# Altium PCB Sensor_Box_Smart_IO.PCBDOC (part 1 of 2)
Units mil, origin at the board's own origin, x right, y up, seen from the top; angles counter-clockwise.
Board outline 895.86 x 2876.17 mil, 2 copper layers (Top, Bot), stack 61.855 mil thick; 100 components, 69 nets, 285 pads, 161 vias.
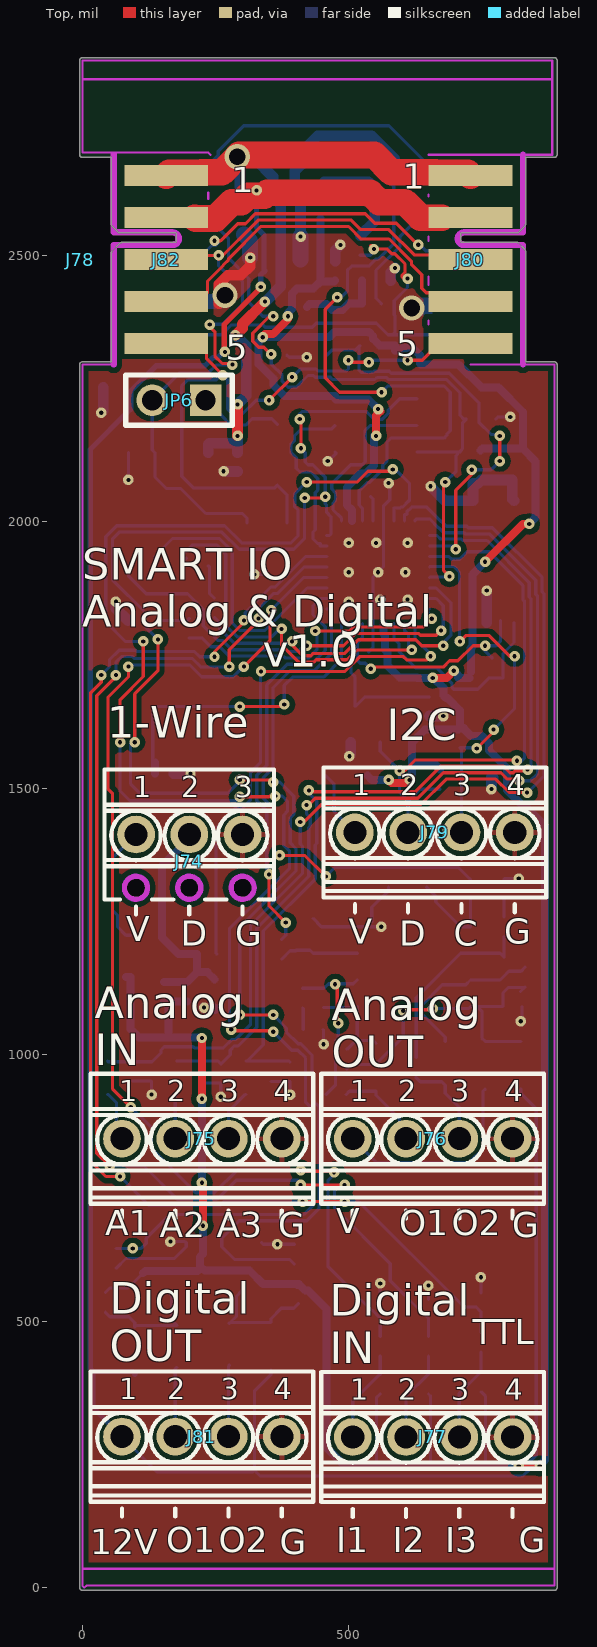
[diagram p0: Top view]
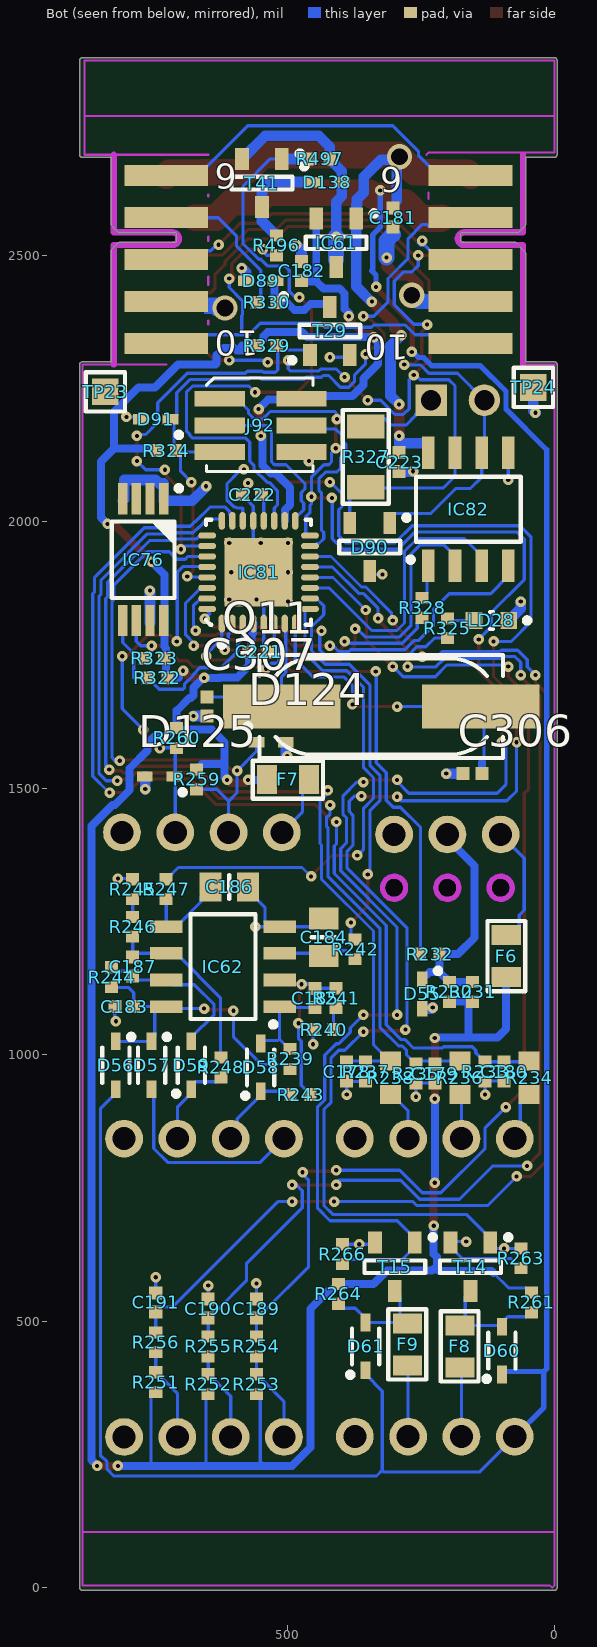
[diagram p1: Bot view, seen from below]
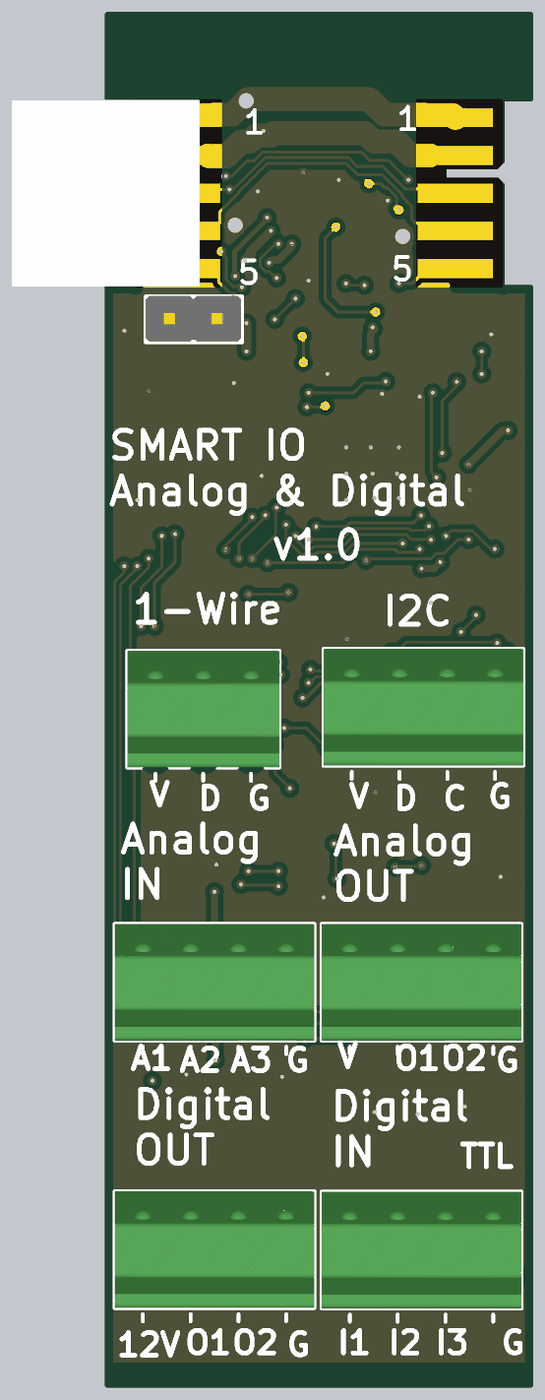
[diagram p3: 3D render of the assembled board from above, using the file's embedded part models]
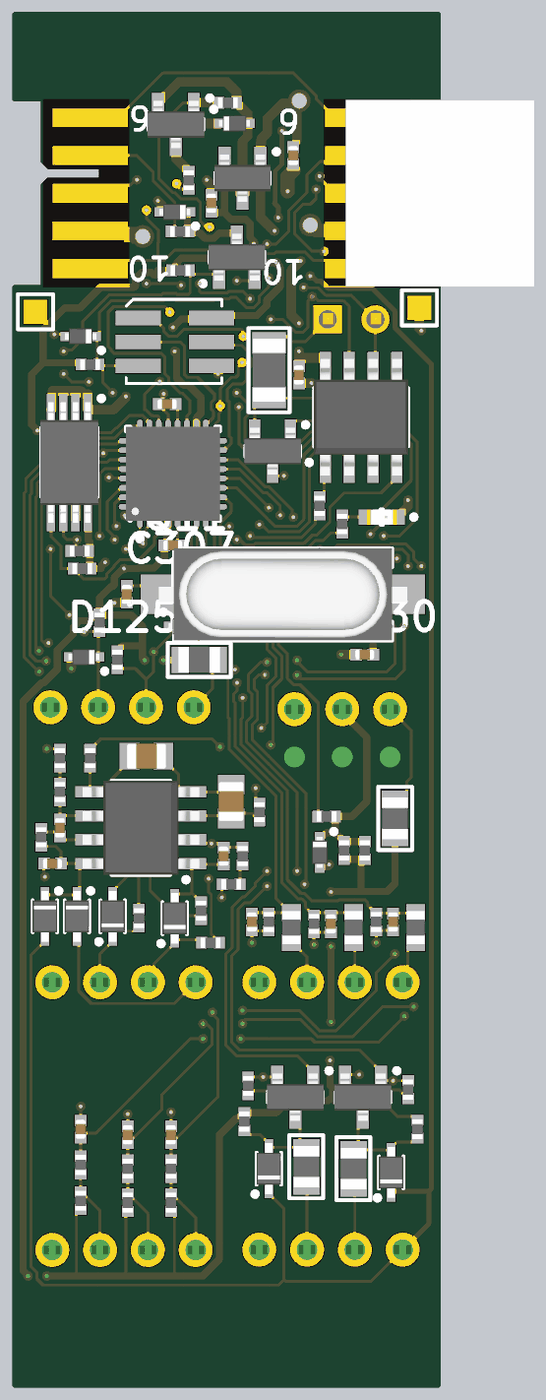
[diagram p4: 3D render of the assembled board from below, using the file's embedded part models]

## Layer stack, top to bottom
TopSolder: solder mask 0.4, Solder Resist, Dk 3.5
Top: signal copper 1.4
Dielectric1: core 59.0551, FR-4, Dk 4.8
Bot: signal copper 1.4
BottomSolder: solder mask 0.4, Solder Resist, Dk 3.5

## Board outline
-5.02,0 -5.02,2295.28 cw(c0,2295.28) 0,2300.29 54.04,2300.29 54.04,2503.94 cw(c59.06,2503.94) 55.53,2507.5 55.51,2507.48 71.26,2523.23 71.24,2523.21 cw(c74.8,2519.68) 74.8,2524.7 176.09,2524.7 176.09,2542.23 70.87,2542.23 cw(c70.87,2547.24) 67.3,2543.71 67.32,2543.7 55.51,2555.51 55.53,2555.49 cw(c59.06,2559.06) 54.04,2559.06 54.04,2683.96 0,2683.96 cw(c0,2688.98) -5.02,2688.98 -5.02,2866.14 ccw(c0,2866.14) -5.02,2866.14 cw(c0,2866.14) 0,2871.16 885.83,2871.16 cw(c885.83,2866.14) 890.84,2866.14 890.84,2688.98 cw(c885.83,2688.98) 885.83,2683.96 831.79,2683.96 831.79,2559.06 cw(c826.77,2559.06) 830.3,2555.49 830.32,2555.51 818.51,2543.7 818.52,2543.72 cw(c814.96,2547.24) 814.96,2542.23 709.74,2542.23 709.74,2524.7 814.96,2524.7 cw(c814.96,2519.69) 818.52,2523.21 818.51,2523.23 830.32,2511.42 830.3,2511.44 cw(c826.77,2507.87) 831.79,2507.87 831.79,2300.29 885.83,2300.29 cw(c885.83,2295.28) 890.84,2295.28 890.84,0 cw(c885.83,0) 885.83,-5.01 0.04,-5.01 cw(c0,0)

## Design rules (kind name [scope] priority, off if disabled: settings)
Clearance Clearance_DIFF [(InDifferentialPairClass('All Differential Pairs'))] p1: gap=5 ignorepadtopadclearanceinfootprint=FALSE except(0: Arc-Hole Track-Hole SMDPad-Hole THPad-Hole Via-Hole Fill-Hole Poly-Hole Region-Hole Text-Hole; 10: Arc-Poly Track-Poly SMDPad-Poly THPad-Poly Via-Poly Fill-Poly Poly-Poly Poly-Region Poly-Text)
Clearance [All] p2: gap=6 ignorepadtopadclearanceinfootprint=FALSE except(10: Arc-Poly Track-Poly SMDPad-Poly THPad-Poly Via-Poly Fill-Poly Poly-Poly)
DiffPairsRouting [All] p1: maxlimit=10 minlimit=5 mostfreqgap=5 toplayer_minwidth=5 toplayer_maxwidth=15 toplayer_prefwidth=10 bottomlayer_minwidth=5 bottomlayer_maxwidth=15 bottomlayer_prefwidth=10 maxuncoupledlength=500
FabricationTestPointUsage TestPointUsage [All] p1: valid=0 allowmultiple=FALSE
FabricationTestpoint Testpoint [All] p1: side=3 testpointundercomponent=TRUE minsize=40 maxsize=100 preferedsize=60 minholesize=20 maxholesize=40 preferedholesize=32 testpointgrid=1 allowsidetop=TRUE allowsidebottom=TRUE usegrid=TRUE gridtolerance=0.01
HoleSize [All] p1: absolutevalues=TRUE maxlimit=150 minlimit=1 maxpercent=80.000 minpercent=20.000
HoleToHoleClearance [All] p1: gap=1 allowstackedmicrovias=TRUE
MinimumSolderMaskSliver [All] p1: minsoldermaskwidth=0
PlaneClearance [All] p1: clearance=10
PlaneConnect [All] p1: planeconnectstyle=Direct reliefexpansion=20 reliefentries=4 reliefconductorwidth=10 reliefairgap=10
PolygonConnect PolygonConnect_pad [(InPadClass('All Pads'))] p1: connectstyle=Relief reliefconductorwidth=10 reliefentries=4 polygonreliefangle="90 Angle" airgapwidth=10
PolygonConnect [All] p2: connectstyle=Direct reliefconductorwidth=10 reliefentries=4 polygonreliefangle="45 Angle" airgapwidth=10
RoomDefinition Sensor_Box_Smart_IO [InComponentClass('Sensor_Box_Smart_IO')] p1 off: confinementstyle=ConfineIn formatcopy=TRUE lockcomponents=FALSE outline 793.29,1049.2 7988.16,1049.2 7988.16,1984.24 793.29,1984.24
RoutingVias [All] p1: holewidth=7.87 width=19.68 viastyle="Through Hole" minholewidth=7.87 minwidth=19.68 maxholewidth=28 maxwidth=50
SilkToSilkClearance [All] p1: silktosilkclearance=0
SilkToSolderMaskClearance SilkscreenOverComponentPads [IsPad] p1: minsilkscreentomaskgap=0 clearancetoexposedcopper=TRUE
SolderMaskExpansion [All] p1: expansion=2
Width [All] p1: maxlimit=50 minlimit=5 preferedwidth=5
20 further rules are at their usual default settings.

## Components (designator, comment, footprint, x,y, rotation, side; value= is the part's Value field where it differs from the comment)
C178 "100nF" CAPC1005X55N 389.76,968.5 r270 bottom
C179 "100nF" CAPC1005X55N 224.41,964.57 r270 bottom
C180 "100nF" CAPC1005X55N 94.49,968.5 r270 bottom
C181 "1uF" CAPC1005X55N 303.15,2570.87 r90 bottom
C182 "1uF" CAPC1005X55N 474.41,2471.1 r270 bottom
C183 "1uF" CAPC1005X55N 807.09,1090.55 r180 bottom
C184 "10uF" CAPC2012X135N 433.07,1220.47 r90 bottom
C185 "18pF" CAPC1005X55N 448.82,1106.3 r90 bottom
C186 "10uF" CAPC2012X135N 610.24,1314.96 r180 bottom
C187 "18pF" CAPC1005X55N 791.34,1165.35 r90 bottom
C189 "18pF" CAPC1005X55N 559.06,523.62 r90 bottom
C190 "18pF" CAPC1005X55N 649.61,523.62 r90 bottom
C191 "18pF" CAPC1005X55N 748.03,535.43 r90 bottom
C221 "100nF" CAPC1005X55N 555.12,1755.91 r0 bottom
C222 "1uF" CAPC1005X55N 567.15,2051.18 r0 bottom
C223 "100nF" CAPC1005X55N 291.34,2112.2 r270 bottom
C306 "18pF" CAPC1005X55N 153.75,1527.56 r180 bottom
C307 "18pF" CAPC1005X55N 651.62,1653.54 r90 bottom
D55 "PESD3V3S1UB" SODFL1608X65N 247.92,1114.17 r270 bottom
D56 "1N4148WS" SODFL2512X100N 822.83,980.31 r270 bottom
D57 "1N4148WS" SODFL2512X100N 755.91,980.31 r270 bottom
D58 "1N4148WS" SODFL2512X100N 551.18,976.38 r90 bottom
D59 "1N4148WS" SODFL2512X100N 681.1,980.31 r90 bottom
D60 "1N4148WS" SODFL2512X100N 98.43,444.88 r90 bottom
D61 "1N4148WS" SODFL2512X100N 354.33,452.76 r90 bottom
D89 "PESD3V3S1UB" SODFL1608X65N 551.04,2452.76 r0 bottom
D90 "SM712" SOT95P237X112-3N 346.46,1952.76 r270 bottom
D91 "PESD3V3S1UB" SODFL1608X65N 748.03,2192.91 r0 bottom
D124 "PESD3V3S1UB" SODFL1608X65N 531.5,1586.61 r180 bottom
D125 "PESD3V3S1UB" SODFL1608X65N 741.04,1522.21 r0 bottom
D138 "PESD3V3S1UB" SODFL1608X65N 426.27,2637.8 r180 bottom
F6 "RFSI050" 0805R 90.55,1185.04 r270 bottom
F7 "RFSI050" 0805R 500,1516.64 r0 bottom
F8 "RFSI050" 0805R 177.17,452.76 r90 bottom
F9 "RFSI050" 0805R 275.59,456.69 r90 bottom
IC61 "AP7313-33SAG-7" SOT95P240X130-3N 409.45,2523.62 r270 bottom
IC62 "LM358AD" SOIC127P600X175-8N 622.05,1165.35 r0 bottom
IC76 "M24256-BRDW6" SOP65P640X120-8N 771.65,1929.13 r270 bottom
IC81 "ATMEGA328PB-MU" QFN50P500X500X100-33N-S325 555.12,1905.51 r90 bottom
IC82 "ST485ECDR" SOIC127P600X175-8N 161.42,2023.62 r90 bottom
J74 "=Family" PHOENIX_1725669 200.79,1413.39 r0 top
J75 "=Family" PHOENIX_1725672 224.41,842.52 r0 top
J76 "=Family" PHOENIX_1725672 657.48,842.52 r0 top
J77 "=Family" PHOENIX_1725672 657.48,282.78 r0 top
J78 "=Family" "AVX_00 9159 010 061 916" -3.94,2492.13 r180 top
J79 "=Family" PHOENIX_1725672 661.42,1417.32 r0 top
J80 "=Family" EDGE10T5B10_P200W1000L0F100X400 728.35,2334.65 r90 top
J81 "=Family" PHOENIX_1725672 224.41,283.46 r0 top
J82 "=Family" EDGE10T1B6_P200W1000L0F100X400 157.48,2649.61 r270 top
J92 "ZL322-2X3P or PLHTD6S-TR-CV" ZL322-2X3P 551.18,2181.1 r270 bottom
JP6 "1798942 (goldpin 2x 2.54)" jump 231.3,2228.35 r270 top
LD28 "Green" LED_KINGBRIGHT_KPH-1608CGCK 118.11,1814.96 r0 bottom
Q11 "8.192MHz" XTAL_ABRACON_ABLS 324.8,1653.54 r0 bottom locked
R230 "10k" RESC1005X40N 196.85,1118.11 r270 bottom
R231 "10k" RESC1005X40N 153.54,1118.11 r270 bottom
R232 "49R9" RESC1005X40N 233.8,1188.98 r0 bottom
R233 "1k" RESC1005X40N 129.92,968.5 r90 bottom
R234 "9k1" RESC1608X55N 47.24,956.69 r270 bottom
R235 "1k" RESC1005X40N 259.84,964.57 r90 bottom
R236 "9k1" RESC1608X55N 177.17,956.69 r270 bottom
R237 "1k" RESC1005X40N 354.33,968.5 r90 bottom
R238 "9k1" RESC1608X55N 307.09,956.69 r270 bottom
R239 "10k" RESC1005X40N 496.06,992.13 r90 bottom
R240 "10k" RESC1005X40N 433.07,1047.24 r0 bottom
R241 "10k" RESC1005X40N 409.45,1106.3 r270 bottom
R242 "10k" RESC1005X40N 374.02,1198.03 r90 bottom
R243 "10k" RESC1005X40N 476.38,925.2 r180 bottom
R244 "10k" RESC1005X40N 830.71,1145.67 r90 bottom
R245 "10k" RESC1005X40N 791.34,1311.02 r90 bottom
R246 "10k" RESC1005X40N 791.34,1240.16 r90 bottom
R247 "10k" RESC1005X40N 728.35,1311.02 r90 bottom
R248 "10k" RESC1005X40N 625.98,976.38 r90 bottom
R251 "10k" RESC1005X40N 748.03,385.83 r90 bottom
R252 "10k" RESC1005X40N 649.61,381.89 r90 bottom
R253 "10k" RESC1005X40N 559.06,381.89 r90 bottom
R254 "10k" RESC1005X40N 559.06,452.76 r270 bottom
R255 "10k" RESC1005X40N 649.61,452.76 r270 bottom
R256 "10k" RESC1005X40N 748.03,460.63 r270 bottom
R259 "1k" RESC1005X40N 671.31,1516.64 r270 bottom
R260 "1k" RESC1005X40N 708.66,1594.49 r270 bottom
R261 "10k" RESC1005X40N 43.31,535.43 r270 bottom
R263 "100k" RESC1005X40N 62.99,618.11 r90 bottom
R264 "10k" RESC1005X40N 405.51,551.18 r270 bottom
R266 "100k" RESC1005X40N 397.64,625.98 r270 bottom
R322 "10k" RESC1005X40N 744.78,1707.32 r0 bottom
R323 "10k" RESC1005X40N 750.51,1744.09 r0 bottom
R324 "10k" RESC1005X40N 728.35,2133.86 r180 bottom
R325 "10k" RESC1005X40N 200.79,1800.39 r90 bottom
R327 "120R" 1206R 353.88,2122.05 r90 bottom
R328 "1k" RESC1005X40N 248.03,1838.58 r90 bottom
R329 "100k" RESC1005X40N 539.37,2330.71 r0 bottom
R330 "49R9" RESC1005X40N 540.17,2412.07 r180 bottom
R496 "49R9" RESC1005X40N 521.73,2518.84 r90 bottom
R497 "10k" RESC1005X40N 440.1,2681.1 r180 bottom
T14 "BSS138LT1G" SOT95P240X110-3N 157.48,602.36 r270 bottom
T15 "BSS138LT1G" SOT95P240X110-3N 299.21,602.36 r270 bottom
T29 "BSS138LT1G" SOT95P240X110-3N 421.26,2358.27 r90 bottom
T41 "BSS138LT1G" SOT95P240X110-3N 548.69,2635.83 r270 bottom
TP23 "Test Point" TPS127 842.52,2244.09 r270 bottom
TP24 "Test Point" TPS127 39.37,2252.28 r270 bottom

## Footprints (in the part's own frame and the unit in brackets; to place one, negate y for a bottom-side part, rotate by r counter-clockwise, add the part's x,y. Pads: shape width x height; smd on the part's side, far side on the other; paste and mask are expansions set on the pad)
0805R [mm]
  rect 0.95x1.4 smd: 1(-1,0) 2(1,0)
  silkscreen extent -1.68,-0.89 1.68,0.91, body extent -1.1,-0.67 1.1,0.68, height 0.6
1206R [mm]
  rect 1.15x1.8 smd: 1(-1.45,0) 2(1.45,0)
  silkscreen extent -2.24,-1.09 2.24,1.09, body extent -1.67,-0.87 1.68,0.88, height 0.65
"AVX_00 9159 010 061 916" [mil] "10 Contacts, 2mm Pitch, Open Ended Card Edge Connector, 9159 Series"
  body extent -197,-195 197,195, height 67
CAPC1005X55N [mm] "Chip Capacitor, Body 1.0x0.55mm, IPC Medium Density"
  rect 0.62x0.62 smd: 1(-0.45,0) 2(0.45,0)
  body extent -0.52,-0.27 0.53,0.28, height 0.55
CAPC2012X135N [mm] "Chip Capacitor, Body 2.0x1.25mm, IPC Medium Density"
  rect 1.05x1.4 smd: 1(-0.9,0) 2(0.9,0)
  silkscreen extent 0,-0.58 0,0.58, body extent -1.05,-0.67 1.05,0.68, height 1.25
EDGE10T1B6_P200W1000L0F100X400 [mm] "10 contacts Board Edge Connector, First Left Top Pad 1, First Left Bottom Pad 2, Pitch 2mm, Length 0mm, Width 10mm, Finger Lenght 4mm, Finger Width 1mm"
  rect 1x4 smd paste-0.5: 1(0,0) 2(2,0) 3(4,0) 4(6,0) 5(8,0)
  rect 1x4 smd far side paste-0.5: 6(0,0) 7(2,0) 8(4,0) 9(6,0) 10(8,0)
  KeepOutLayer lines w0.3: 9,-2.5 3.3,-2.5 3.3,0.3 ccw(c3,0.3) 2.7,0.3 2.7,-2.5 -1,-2.5
EDGE10T5B10_P200W1000L0F100X400 [mm] "10 contacts Board Edge Connector, First Left Top Pad 5, First Left Bottom Pad 10, Pitch 2mm, Length 0mm, Width 10mm, Finger Lenght 4mm, Finger Width 1mm"
  rect 1x4 smd paste-0.5: 1(8,0) 2(6,0) 3(4,0) 4(2,0) 5(0,0)
  rect 1x4 smd far side paste-0.5: 6(8,0) 7(6,0) 8(4,0) 9(2,0) 10(0,0)
  KeepOutLayer lines w0.3: -1,-2.5 4.7,-2.5 4.7,0.3 cw(c5,0.3) 5.3,0.3 5.3,-2.5 9,-2.5
jump [mm]
  rect 1.5x1.5 hole 0.965: 1(0,0)
  round 1.5 hole 0.965: 2(0,-2.54)
  silkscreen extent -1.2,-3.81 1.2,1.27, body extent -1.26,-3.84 1.19,1.24, height 8
LED_KINGBRIGHT_KPH-1608CGCK [mm] "SMT Green LED, Case 0603, Body L 1.6 x W 0.8mm H 0.65mm"
  rect 0.8x0.8 smd: 1(-0.825,0) 2(0.825,0)
  silkscreen extent -1.82,-0.4 0.08,0.4, body extent -0.8,-0.4 0.8,0.4, height 0.65
PHOENIX_1725669 [mm] "Micro PCB Terminal Block, Pitch 2.54mm, 3 Positions, Screw Connection"
  round 1.8 hole 1.1: 1(-2.54,0) 2(0,0) 3(2.54,0)
  round 0.5 hole 1.1 unplated mask+0.3: 4(-2.54,-2.54) 5(0,-2.54) 6(2.54,-2.54)
  silkscreen extent -4.04,-3.81 4.04,3.1, body extent -4.04,-3.1 4.04,3.1, height 8.5
PHOENIX_1725672 [mm] "Micro PCB Terminal Block, Pitch 2.54mm, 4 Positions, Screw Connection"
  round 1.8 hole 1.1: 1(-3.81,0) 2(-1.27,0) 3(1.27,0) 4(3.81,0)
  silkscreen extent -5.31,-3.81 5.31,3.1, body extent -5.31,-3.1 5.31,3.1, height 8.5
QFN50P500X500X100-33N-S325 [mm] "QFN, (MO-220-VHHD-4) 0.50mm pitch,square; 8 pin X 8 pin, 5mm X 5mm X 1.00mm H body (w/thermal tab 3.25 X 3.25mm),  IPC Medium Density"
  oval 0.85x0.3 smd: 1(-2.45,1.75) 2(-2.45,1.25) 3(-2.45,0.75) 4(-2.45,0.25) 5(-2.45,-0.25) 6(-2.45,-0.75) 7(-2.45,-1.25) 8(-2.45,-1.75) 17(2.45,-1.75) 18(2.45,-1.25) 19(2.45,-0.75) 20(2.45,-0.25) 21(2.45,0.25) 22(2.45,0.75) 23(2.45,1.25) 24(2.45,1.75)
  oval 0.3x0.85 smd: 9(-1.75,-2.45) 10(-1.25,-2.45) 11(-0.75,-2.45) 12(-0.25,-2.45) 13(0.25,-2.45) 14(0.75,-2.45) 15(1.25,-2.45) 16(1.75,-2.45) 25(1.75,2.45) 26(1.25,2.45) 27(0.75,2.45) 28(0.25,2.45) 29(-0.25,2.45) 30(-0.75,2.45) 31(-1.25,2.45) 32(-1.75,2.45)
  rect 3.25x3.25 smd: 33(0,0)
  silkscreen extent -3.57,-2.5 2.5,2.5, body extent -2.5,-2.5 2.5,2.5, height 1
RESC1005X40N [mm] "Chip Resistor, EIA 0402, Metric 1005, Body 1.0x0.5mm, IPC Medium Density"
  rect 0.58x0.62 smd: 1(-0.47,0) 2(0.47,0)
  body extent -0.52,-0.27 0.53,0.28, height 0.4
RESC1608X55N [mm] "Chip Resistor, EIA 0603, Metric 1608, Body 1.6x0.8mm, IPC Medium Density"
  rect 0.9x1 smd: 1(-0.8,0) 2(0.8,0)
  body extent -0.87,-0.47 0.88,0.48, height 0.55
SODFL1608X65N [mm] "Ultra Small Outline Diode Flat Lead (SOD-523), Body; 1.2mm L X 0.8mm W X 0.65mm H, IPC Medium Density"
  rect 0.75x0.5 smd: 1(-0.7,0) 2(0.7,0)
  silkscreen extent -1.22,0.63 -0.98,0.87, body extent -0.82,-0.42 0.83,0.43, height 0.65
SODFL2512X100N [mm] "SODFL Diode; 1.70mm W X 1.25mm L X 1.00mm H body, IPC Medium Density"
  rect 0.84x0.46 smd: 1(-1.14,0) 2(1.14,0)
  silkscreen extent -1.47,-0.65 0.85,0.85, body extent -1.35,-0.65 1.35,0.65, height 1
SOIC127P600X175-8N [mm] "SOIC 8, Pitch 1.27mm - Body 4x5mm, IPC Medium Density"
  rect 1.55x0.6 smd: 1(-2.7,1.905) 2(-2.7,0.635) 3(-2.7,-0.635) 4(-2.7,-1.905) 5(2.7,-1.905) 6(2.7,-0.635) 7(2.7,0.635) 8(2.7,1.905)
  silkscreen extent -2.52,-2.5 1.55,2.88, body extent -3.1,-2.5 3.1,2.5, height 1.75
SOP65P640X120-8N [mm] "SOP, 0.65mm pitch; 8 pin, 4.40mm W X 3.00mm L X 1.20mm H body, IPC Medium Density"
  rect 1.5x0.45 smd: 1(-2.9,0.975) 2(-2.9,0.325) 3(-2.9,-0.325) 4(-2.9,-0.975) 5(2.9,-0.975) 6(2.9,-0.325) 7(2.9,0.325) 8(2.9,0.975)
  silkscreen extent -3.52,-1.5 1.83,1.82, body extent -3.2,-1.55 3.2,1.55, height 1.2
SOT95P237X112-3N [mm] "SOT, 0.95mm, pitch; 3 pin,1.30mm W X 2.92mm L X 1.12mm H body, IPC Medium Density"
  rect 1.05x0.6 smd: 1(-1.15,0.95) 2(-1.15,-0.95) 3(1.15,0)
  silkscreen extent -1.52,-1.45 0.3,1.87, body extent -1.25,-1.5 1.25,1.5, height 1.1
SOT95P240X110-3N [mm] "SOT23 3-Leads, Pitch 0.95mm, Body 1.3x2.9mm, IPC Medium Density"
  rect 1.05x0.65 smd: 1(-1.15,0.95) 2(-1.15,-0.95) 3(1.15,0)
  silkscreen extent -1.52,-1.45 0.3,1.92, body extent -1.25,-1.5 1.25,1.5, height 1.1
SOT95P240X130-3N [mm] "SOT23 3-Leads, Pitch 0.95mm - Body 1.3x2.9mm, IPC Medium Density"
  rect 1.05x0.65 smd: 1(-1.15,0.95) 2(-1.15,-0.95) 3(1.15,0)
  silkscreen extent -1.52,-1.45 0.3,1.92, body extent -1.25,-1.5 1.25,1.5, height 1.3
TPS127 [mil] "1.27 x  1.27mm SMD Test Point Area"
  rect 50x50 smd paste-50: 1(0,0)
  silkscreen extent -37,-37 37,37
XTAL_ABRACON_ABLS [mm] "HC/49US (AT49) SMD Cristal, Body 11.4x4.7mm, ABLS Serie"
  rect 5.6x2.1 smd: 1(-4.75,0) 2(4.75,0)
  silkscreen extent -5.8,-2.45 5.8,2.45, body extent -6.6,-2.45 6.6,2.45, height 4.2
ZL322-2X3P [mm] "SMT 1.27 mm dual goldpin"
  rect 0.76x2.4 smd: 1(-1.27,-1.95) 2(-1.27,1.95) 3(0,-1.95) 4(0,1.95) 5(1.27,-1.95) 6(1.27,1.95)
  silkscreen extent -2.25,-2.58 2.2,2.5, body extent -2.05,-2.15 2.03,2.15, height 4.5

## Part data
C178 C179 C180 C223: library part CC0402_100NF_16V_10%_X7R, "Non-polarised capacitor", Case=0402, Manufacturer=GENERIC, Manufacturer1 ComponentHeight=0.55mm, Manufacturer1 Example=MURATA, Manufacturer1 Part Number=GRM155R71C104KA88D, Tolerance=±10%, Voltage=16V, Author="CERN DEM JLC", Component Type=Standard, CreateDate=05.12.2013, HelpURL=\\cern.ch\dfs\Applications\Altium\Datasheets\CC0402_X7R_MURATA_GRM.pdf, LatestRevisionDate=03.12.2007, Manufacturer Part Number=CC0402_100NF_16V_10%_X7R, Mounted=Yes, Part Description="SMD Multilayer Chip Ceramic Capacitor", Part Number=CC0402_100NF_16V_10%_X7R, Pin Count=2, Sense=No, SMD=Yes, Socket=No, Status="Not Recommended", TC=X7R
C181 C182 C183 C222: library part CC0402_1UF_16V_10%_X5R, "Non-polarised capacitor", Case=0402, Manufacturer=GENERIC, Manufacturer1 ComponentHeight=0.55mm, Manufacturer1 Example=TDK, Manufacturer1 Part Number=C1005X5R1C105KT, Tolerance=±10%, Voltage=16V, Author="CERN DEM JLC", Component Type=Standard, CreateDate=25.10.2012, HelpURL=\\cern.ch\dfs\Applications\Altium\Datasheets\CC0402_X5R_TDK_C.pdf, LatestRevisionDate=25.10.2012, Manufacturer Part Number=CC0402_1UF_16V_10%_X5R, Mounted=Yes, Part Description="SMD Multilayer Chip Ceramic Capacitor", Part Number=CC0402_1UF_16V_10%_X5R, Pin Count=2, Sense=No, SMD=Yes, Socket=No, Status=Preferred, TC=X5R
C184 C186: library part CC0805_10UF_16V_10%_X5R, "Non-polarised capacitor", Case=0805, Manufacturer=GENERIC, Manufacturer1 ComponentHeight=1.4mm, Manufacturer1 Example=KEMET, Manufacturer1 Part Number=C0805C106K4PAC, Tolerance=±10%, Voltage=16V, Author="CERN DEM JLC", Component Type=Standard, CreateDate=03.12.2007, HelpURL=\\cern.ch\dfs\Applications\Altium\Datasheets\CC1206_X5R_KEMET.pdf, LatestRevisionDate=03.12.2007, Manufacturer Part Number=CC0805_10UF_16V_10%_X5R, Mounted=Yes, Part Description="SMD Multilayer Chip Ceramic Capacitor", Part Number=CC0805_10UF_16V_10%_X5R, Pin Count=2, Sense=No, SMD=Yes, Socket=No, Status=Preferred, TC=X5R
C185 C187 C189 C190 C191 C306 C307: library part CC0402_18PF_50V_5%_C0G, "Non-polarised capacitor", Case=0402, Manufacturer=GENERIC, Manufacturer1 ComponentHeight=0.55mm, Manufacturer1 Example=KEMET, Manufacturer1 Part Number=C0402C180J5GACTU, Tolerance=±5%, Voltage=50V, Author="CERN DEM JLC", Component Type=Standard, CreateDate=04.10.2016, HelpURL="\\cern.ch\dfs\Applications\Altium\Datasheets\CC0805_C0G_KEMET_(Commercial Grade).pdf", LatestRevisionDate=04.10.2016, Manufacturer Part Number=CC0402_18PF_50V_5%_C0G, Mounted=Yes, Part Description="SMD Multilayer Chip Ceramic Capacitor", Part Number=CC0402_18PF_50V_5%_C0G, Pin Count=2, Sense=No, SMD=Yes, Socket=No, Status=Preferred, TC=C0G/NP0
C221: library part CC0402_100NF_16V_10%_X5R, "Non-polarised capacitor", Case=0402, Manufacturer=GENERIC, Manufacturer1 ComponentHeight=0.55mm, Manufacturer1 Example=MURATA, Manufacturer1 Part Number=GRM155R61C104KA88D, Tolerance=±10%, Voltage=16V, Author="CERN DEM JLC", Component Type=Standard, CreateDate=10.12.2013, HelpURL=\\cern.ch\dfs\Applications\Altium\Datasheets\CC0402_X5R_MURATA_GRM.pdf, LatestRevisionDate=10.12.2013, Manufacturer Part Number=CC0402_100NF_16V_10%_X5R, Mounted=Yes, Part Description="SMD Multilayer Chip Ceramic Capacitor", Part Number=CC0402_100NF_16V_10%_X5R, Pin Count=2, Sense=No, SMD=Yes, Socket=No, Status=None, TC=X5R
D55 D89 D91 D124 D125 D138: "ESD protection diode", Case=SOD523, Manufacturer="NXP SEMICONDUCTORS", Power=330W, Voltage=3V3, Author="CERN DEM JLC", Bonding=No, ComponentHeight=0.65mm, Component Type=Standard, CreateDate=29.11.2012, Device=PESD3V3S1UB, HelpURL=\\cern.ch\dfs\Applications\Altium\Datasheets\PESD3V3S1UB.pdf, LatestRevisionDate=29.11.2012, Manufacturer Part Number=PESD3V3S1UB, Mounted=Yes, PackageDescription="Ultra Small Outline Diode Flat Lead (SOD-523), Body; 1.2mm L X 0.8mm W X 0.65mm H, IPC Medium Density", Part Description="ESD protection diode (23kV)", Part Number=PESD3V3S1UB, Pin Count=2, PressFit=No, Sense=No, SMD=Yes, Socket=No
D56 D57 D58 D59 D60 D61: "Diode", Case=SOD-323F, Manufacturer="FAIRCHILD SEMICONDUCTOR", Power=150mA, Voltage=75V, Author="CERN DEM JLC", Bonding=No, ComponentHeight=1mm, Component Type=Standard, CreateDate=12.05.2011, Device=1N4148WS, HelpURL=\\cern.ch\dfs\Applications\Altium\Datasheets\1N4148WS.pdf, LatestRevisionDate=12.05.2011, Manufacturer Part Number=1N4148WS, Mounted=Yes, PackageDescription="SODFL Diode; 1.70mm W X 1.25mm L X 1.00mm H body, IPC Medium Density", Part Description="Small Signal Diodes", Part Number=1N4148WS, Pin Count=2, PressFit=No, Sense=No, SMD=Yes, Socket=No
D90: "Asymmetrical TVS Diode for Extended Common-Mode RS-485", Case=SOT-23, Manufacturer=SEMTECH, Power=400W, Voltage=12V/-7V, Author="CERN DEM JLC", Bonding=No, ComponentHeight=1.12mm, Component Type=Standard, CreateDate=23.04.2012, Device=SM712, HelpURL=\\cern.ch\dfs\Applications\Altium\Datasheets\SM712.pdf, LatestRevisionDate=23.04.2012, Manufacturer Part Number=SM712, Mounted=Yes, PackageDescription="SOT, 0.95mm, pitch; 3 pin,1.30mm W X 2.92mm L X 1.12mm H body, IPC Medium Density", Part Description="Asymmetrical TVS Diode for Extended Common-Mode RS-485", Part Number=SM712, Pin Count=3, PressFit=No, Sense=No, SMD=Yes, Socket=No, Status=Obsolete
F6 F7 F8 F9: library part F_PTC_0.05A, "50mA polymer FUSE"
IC61: "3-Terminal Regulator 1=IN 2=OUT 3=GND", Case=SOT23, Manufacturer="DIODES INCORPORATED", Author="CERN DEM JLC", Bonding=No, ComponentHeight=1.35mm, Component Type=Standard, CreateDate=20.03.2018, Device=AP7313-33SAG-7, HelpURL=\\cern.ch\dfs\Applications\Altium\Datasheets\AP7313-33SAG-7.pdf, LatestRevisionDate=20.03.2018, Manufacturer Part Number=AP7313-33SAG-7, Mounted=Yes, PackageDescription="SOT23 3-Leads, Pitch 0.95mm - Body 1.3x2.9mm, IPC Medium Density", Part Description="3.3V, 150mA Low Quiescent Current, Fast Transient Low Dropout Linear Regulator", Part Number=AP7313-33SAG-7, Pin Count=3, PressFit=No, Sense=No, SMD=Yes, Socket=No
IC62: "Dual Operational Amplifier", Case=SOIC8, Manufacturer="TEXAS INSTRUMENTS", Author="CERN DEM JLC", Bonding=No, ComponentHeight=1.75mm, Component Type=Standard, CreateDate=02.12.2008, Device=LM358AD, HelpURL=\\cern.ch\dfs\Applications\Altium\Datasheets\LM358AD.pdf, LatestRevisionDate=13.04.2010, Manufacturer Part Number=LM358AD, Mounted=Yes, PackageDescription="SOIC 8, Pitch 1.27mm - Body 4x5mm, IPC Medium Density", Part Description="Dual Operational Amplifier", Part Number=LM358AD, Pin Count=8, PressFit=No, Sense=No, SMD=Yes, Socket=No
IC76: "256-Kbit Serial I²C Bus EEPROM", Case=TSSOP8, Manufacturer="ST MICROELECTRONICS", Part Number=M24256-BRDW6P, Author="CERN DEM MR", Bonding=No, ComponentHeight=1.2mm, Component Type=Standard, CreateDate=17.03.2016, Device=M24256-BRDW6, HelpURL=\\cern.ch\dfs\Applications\Altium\Datasheets\M24256-BRDW6P.pdf, LatestRevisionDate=17.03.2016, Manufacturer Part Number=M24256-BRDW6, Mounted=Yes, PackageDescription="SOP, 0.65mm pitch; 8 pin, 4.40mm W X 3.00mm L X 1.20mm H body, IPC Medium Density", Part Description="256-Kbit Serial I²C Bus EEPROM", Pin Count=8, PressFit=No, Sense=No, SMD=Yes, Socket=No
IC81: "8-bit AVR 20MHz Microcontroller With 32K Bytes In-System  Programmable  Flash", Case=QFN32, Manufacturer=ATMEL, Author=GK, Bonding=No, ComponentHeight=1mm, Component Type=Standard, CreateDate=2011-02-08, Device=ATMEGA328PB-MU, HelpURL=\\cern.ch\dfs\Applications\Altium\Datasheets\ATMEGA328P-MU.pdf, LatestRevisionDate=2014-07-02, Manufacturer Part Number=ATMEGA328PB-MU, Mounted=Yes, PackageDescription="QFN, (MO-220-VHHD-2) 0.50mm pitch,square; 8 pin X 8 pin, 5mm X 5mm X 1.00mm H body (w/thermal tab 3.25 X 3.25mm),  IPC Medium Density", Part Description="8-bit AVR Microcontroller, 32KB Flash, 1KB EEPROM, 2KB SRAM, 32-pin MLF, Industrial Grade (-40°C to 85°C)", Part Number=ATMEGA328PB-MU, Pin Count=33, PressFit=No, Sense=No, SMD=Yes, Socket=No
IC82: "±15kV ESD-Protected, Low Power  RS-485/RS-422 Transceiver", Case=SOIC8, Manufacturer="ST MICROELECTRONICS", Author="CERN DEM MR", Bonding=No, ComponentHeight=1.75mm, Component Type=Standard, CreateDate=15.02.2018, Device=ST485ECDR, HelpURL=\\cern.ch\dfs\Applications\Altium\Datasheets\ST485ECDR.pdf, LatestRevisionDate=15.02.2018, Manufacturer Part Number=ST485ECDR, Mounted=Yes, PackageDescription="SOIC 8, Pitch 1.27mm - Body 4x5mm, IPC Medium Density", Part Description="±15kV ESD-Protected, Low Power  RS-485/RS-422 Transceiver", Part Number=ST485ECDR, Pin Count=8, PressFit=No, Sense=No, SMD=Yes, Socket=No
J74: library part PHOENIX_1725669, "Terminal Block, 3 Positions, Screw Connection", Manufacturer="PHOENIX CONTACT", Manufacturer Part Number="1725669 (MPT 0,5/3-2,54)", Author="CERN DEM JMW", ComponentHeight=8.5mm, Component Type=Standard, CreateDate=07.11.2008, HelpURL=\\cern.ch\dfs\Applications\Altium\Datasheets\PHOENIX_1725669.pdf, LatestRevisionDate=26.04.2010, Mounted=Yes, Part Description="6A, 63V, Terminal Block, Pitch 2.54mm, 3 Positions, Screw Connection", Part Number=PHOENIX_1725669, Pin Count=3, PressFit=No, Sense=No, SMD=No, Socket=No, Status=None
J75 J76 J77 J79 J81: library part PHOENIX_1725672, "Terminal Block, 4 Positions, Screw Connection", Manufacturer="PHOENIX CONTACT", Manufacturer Part Number="1725672 (MPT 0,5/4-2,54)", Author="CERN DEM JMW", ComponentHeight=8.5mm, Component Type=Standard, CreateDate=07.11.2008, HelpURL=\\cern.ch\dfs\Applications\Altium\Datasheets\PHOENIX_1725672.pdf, LatestRevisionDate=26.04.2010, Mounted=Yes, Part Description="6A, 63V, Terminal Block, Pitch 2.54mm, 4 Positions, Screw Connection", Part Number=PHOENIX_1725672, Pin Count=4, PressFit=No, Sense=No, SMD=No, Socket=No, Status=None
J78: library part "AVX_00 9159 010 061 916", "Open Ended Card Edge Connector, 9159 Series", Manufacturer=AVX, Manufacturer Part Number="00 9159 010 061 916", Author="CERN DEM MR", ComponentHeight=1.6mm, Component Type=Standard, CreateDate=13.02.2018, HelpURL="\\cern.ch\dfs\Applications\Altium\Datasheets\AVX_00 9159 010 061 916.pdf", LatestRevisionDate=13.02.2018, Mounted=Yes, Part Description="10 Contacts, 2mm Pitch, Open Ended Card Edge Connector, 9159 Series", Part Number="AVX_00 9159 010 061 916", Pin Count=10, PressFit=No, Sense=No, SMD=No, Socket=No, Status=None
J80: library part EDGE10T5B10_P200W1000L0F100X400, "PCB Edge Connector 10 (2x5)", Author="CERN DEM MR", ComponentHeight=0mm, Component Type="Standard (No BOM)", CreateDate=14.02.2018, HelpURL=\\cern.ch\dfs\Applications\Altium\Datasheets\EDGE10T5B10_P200W1000L0F100X400.pdf, LatestRevisionDate=14.02.2018, Mounted=No, Part Description="10 Contacts Board Edge Connector, Pitch 2mm, Length 0mm, Width 10mm, Finger Lenght 4mm, Finger Width 1mm", Part Number=EDGE10T5B10_P200W1000L0F100X400, Pin Count=10, PressFit=No, Sense=No, SMD=No, Socket=No, Status=None
J82: library part EDGE10T1B6_P200W1000L0F100X400, "PCB Edge Connector 10 (2x5)", Author="CERN DEM MR", ComponentHeight=0mm, Component Type="Standard (No BOM)", CreateDate=14.02.2018, HelpURL=\\cern.ch\dfs\Applications\Altium\Datasheets\EDGE10T1B6_P200W1000L0F100X400.pdf, LatestRevisionDate=14.02.2018, Mounted=No, Part Description="10 Contacts Board Edge Connector, Pitch 2mm, Length 0mm, Width 10mm, Finger Lenght 4mm, Finger Width 1mm", Part Number=EDGE10T1B6_P200W1000L0F100X400, Pin Count=10, PressFit=No, Sense=No, SMD=No, Socket=No, Status=None
J92: library part "CON_2x3 1.27 SMT Male", "1.27 mm dual row goldpin (Maritex)"
JP6: library part JUMPER, "Jumper", Supplier Part Number 1=1798942, Supplier 1=Farnell
LD28: library part LED_KINGBRIGHT_KPH-1608CGCK, "LED Green 1C 2A", Manufacturer=KINGBRIGHT, Manufacturer Part Number=KPH-1608CGCK, Author="CERN DEM JLC", Bonding=No, Color=Green, ComponentHeight=0.65mm, Component Type=Standard, CreateDate=03.07.2017, HelpURL=\\cern.ch\dfs\Applications\Altium\Datasheets\LED_KINGBRIGHT_KPH-1608CGCK.pdf, LatestRevisionDate=03.07.2017, Mounted=Yes, PackageDescription="SMT Green LED, Case 0603, Body L 1.6 x W 0.8mm H 0.65mm", Part Description="SMD Green LED, Case 1.6mmX0.8mm(0603), 0.65mm Thickness", Part Number=LED_KINGBRIGHT_KPH-1608CGCK, Pin Count=2, PressFit=No, Sense=No, SMD=Yes, Socket=No
Q11: library part XTAL_8.192MHZ_ABRACON_ABLS-8.192MHZ-B2-T, "Quartz Crystal", Manufacturer=ABRACON, Manufacturer Part Number=ABLS-8.192MHZ-B2-T, Author="CERN DEM MR", Bonding=No, ComponentHeight=4.2mm, Component Type=Standard, CreateDate=15.02.2018, HelpURL=\\cern.ch\dfs\Applications\Altium\Datasheets\XTAL_ABRACON_ABLS.pdf, LatestRevisionDate=15.02.2018, Mounted=Yes, PackageDescription="SMD Crystal, Body 11.40mm L X 4.70mm W X 4.20mm H, HC/49US (AT49) ALBS Series", Part Description="Tolerance: ± 20ppm, Stability: ± 50ppm, -20°C to +70°C, 18pF, 80 Ohms ESR, Low Profile Surface Mount Microprocessor Crystal, ABLS Series", Part Number=XTAL_8.192MHZ_ABRACON_ABLS-8.192MHZ-B2-T, Pin Count=2, PressFit=No, Sense=No, SMD=Yes, Socket=No
R230 R231 R239 R240 R241 R242 R243 R244 R245 R246 R247 R248 R251 R252 R253 R254 R255 R256 R261 R264 R322 R323 R324 R325 R497: library part R0402_10K_1%_0.0625W_100PPM, "Resistor - 1%", Case=0402, Manufacturer=GENERIC, Manufacturer1 ComponentHeight=0.4mm, Manufacturer1 Example="YAGEO PHYCOMP", Manufacturer1 Part Number=232270671003L, Power=0.0625W, Tolerance=±1%, Author="CERN DEM JLC", Component Type=Standard, HelpURL=\\cern.ch\dfs\Applications\Altium\Datasheets\R0402_Phycomp_RC0402.pdf, Manufacturer Part Number=R0402_10K_1%_0.0625W_100PPM, Mounted=Yes, Part Description="General Purpose Thick Film Chip Resistor", Part Number=R0402_10K_1%_0.0625W_100PPM, Pin Count=2, SMD=Yes, Socket=No, TC=±100ppm/°C
  R230 R231 R239 R240 R241 R242 R243 R244 R245 R246 R247 R248 R251 R252 R253 R254 R255 R256 R261 R264 R497: CreateDate=2007-12-03, LatestRevisionDate=2012-10-17, Status="Not recommended", Table="Resistors SMD"
  R322 R323 R324 R325: CreateDate=03.12.2007, LatestRevisionDate=17.10.2012, PressFit=No, Sense=No, Status="Not Recommended"
R232 R330 R496: library part R0402_49R9_1%_0.0625W_100PPM, "Resistor - 1%", Case=0402, Manufacturer=GENERIC, Manufacturer1 ComponentHeight=0.4mm, Manufacturer1 Example="YAGEO PHYCOMP", Manufacturer1 Part Number="232270674999L or RC0402FR-0749R9L", Power=0.0625W, Tolerance=±1%, Author="CERN DEM JLC", Component Type=Standard, CreateDate=2012-10-24, HelpURL=\\cern.ch\dfs\Applications\Altium\Datasheets\R0402_Phycomp_RC0402.pdf, LatestRevisionDate=2012-10-24, Manufacturer Part Number=R0402_49R9_1%_0.0625W_100PPM, Mounted=Yes, Part Description="General Purpose Thick Film Chip Resistor", Part Number=R0402_49R9_1%_0.0625W_100PPM, Pin Count=2, SMD=Yes, Socket=No, Status="Not recommended", Table="Resistors SMD", TC=±100ppm/°C
R233 R235 R237 R259 R260 R328: library part R0402_1K_1%_0.0625W_100PPM, "Resistor - 1%", Case=0402, Manufacturer=GENERIC, Manufacturer1 ComponentHeight=0.4mm, Manufacturer1 Example="YAGEO PHYCOMP", Manufacturer1 Part Number=232270671002L, Power=0.0625W, Tolerance=±1%, Author="CERN DEM JLC", Component Type=Standard, CreateDate=03.12.2007, HelpURL=\\cern.ch\dfs\Applications\Altium\Datasheets\R0402_Phycomp_RC0402.pdf, LatestRevisionDate=17.10.2012, Manufacturer Part Number=R0402_1K_1%_0.0625W_100PPM, Mounted=Yes, Part Description="General Purpose Thick Film Chip Resistor", Part Number=R0402_1K_1%_0.0625W_100PPM, Pin Count=2, PressFit=No, Sense=No, SMD=Yes, Socket=No, Status="Not Recommended", TC=±100ppm/°C
R234 R236 R238: library part R0603_9K1_1%_0.1W_100PPM, "Resistor - 1%", Case=0603, Manufacturer=GENERIC, Manufacturer1 ComponentHeight=0.55mm, Manufacturer1 Example="NIC COMPONENT", Manufacturer1 Part Number=NRC06F9101TRF, Power=0.1W, Tolerance=±1%, Author="CERN DEM JLC", Component Type=Standard, CreateDate=03.12.2007, HelpURL=\\cern.ch\dfs\Applications\Altium\Datasheets\R0603_NIC_NRC.pdf, LatestRevisionDate=13.03.2008, Manufacturer Part Number=R0603_9K1_1%_0.1W_100PPM, Mounted=Yes, Part Description="General Purpose Thick Film Chip Resistor", Part Number=R0603_9K1_1%_0.1W_100PPM, Pin Count=2, PressFit=No, Sense=No, SMD=Yes, Socket=No, Status=Preferred, TC=±100ppm/°C
R263 R266 R329: library part R0402_100K_1%_0.0625W_100PPM, "Resistor - 1%", Case=0402, Manufacturer=GENERIC, Manufacturer1 ComponentHeight=0.4mm, Manufacturer1 Example="YAGEO PHYCOMP", Manufacturer1 Part Number=232270671004L, Power=0.0625W, Tolerance=±1%, Author="CERN DEM JLC", Component Type=Standard, CreateDate=03.12.2007, HelpURL=\\cern.ch\dfs\Applications\Altium\Datasheets\R0402_Phycomp_RC0402.pdf, LatestRevisionDate=17.10.2012, Manufacturer Part Number=R0402_100K_1%_0.0625W_100PPM, Mounted=Yes, Part Description="General Purpose Thick Film Chip Resistor", Part Number=R0402_100K_1%_0.0625W_100PPM, Pin Count=2, PressFit=No, Sense=No, SMD=Yes, Socket=No, Status="Not Recommended", TC=±100ppm/°C
R327: library part RES_1206, "SMD Resistor", Supplier Part Number 1=39K0871, Supplier 1=Newark
T14 T15 T29 T41: "N-CHANNEL MOSFET WITH DIODE", Case=SOT23-3, Manufacturer="ON SEMICONDUCTOR", Author="CERN DEM JLC", Bonding=No, ComponentHeight=1.11mm, Component Type=Standard, CreateDate=23.03.2009, Device=BSS138LT1G, HelpURL=\\cern.ch\dfs\Applications\Altium\Datasheets\BSS138LT1G.pdf, LatestRevisionDate=23.03.2009, Manufacturer Part Number=BSS138LT1G, Mounted=Yes, PackageDescription="SOT23 3-Leads, Pitch 0.95mm - Body 1.4x3mm, IPC Medium Density", Part Description="50V 200mA N-Channel Enhancement Mode Field-Effect Transistor", Part Number=BSS138LT1G, Pin Count=3, PressFit=No, Sense=No, SMD=Yes, Socket=No
TP23 TP24: library part SMD_PAD_1.27X1.27MM, Author="CERN DEM JLC", ComponentHeight=0mm, Component Type="Standard (No BOM)", CreateDate=12.01.2008, Family="Test Point", HelpURL=Undefined, LatestRevisionDate=12.01.2008, Mounted=No, PackageDescription="1.27mm x 1.27mm PCB Copper Area (SMD Test Point)", Part Description="1.27mm x 1.27mm PCB Copper Area (SMD Test Point)", Part Number=SMD_PAD_1.27X1.27MM, Pin Count=1, Sense=No, SMD=Yes, Socket=No, Status=None

## Via types
v1: diameter 19.68, hole 7.87, Top to Bot, tented both sides, 151 vias
v2: diameter 19.68, hole 7.87, Top to Bot, 7 vias
v3: diameter 47.24, hole 31.5, Top to Bot, tented both sides, 3 vias

## Nets (pads, with @x,y where several pads share a name; then routed paths per layer and width w, separated by ;. In a path a pad name is that pad's centre, name@x,y a point inside that pad or via, vN(x,y) a via of type N, cw(c..) or ccw(c..) an arc to the next point about the centre after c; other vN are vias at no path point)
1WIRE: IC81.1 R232.2 | length 981.9
  Top w6: v1(335.3,1719.29) 492.53,1719.29 520.43,1747.19 602.29,1747.19 608.48,1741 646.51,1741 v1(653.54,1748.03)
  Bot w6: R232.2@252.31,1188.98 251.05,1190.24 251.05,1426.48 289.08,1464.52 302.19,1464.52 315.42,1477.75 315.42,1529.55 334.08,1548.21 334.08,1718.07 v1(335.3,1719.29) ; IC81.1@624.02,1809.06 624.02,1781.08 653.54,1751.56 v1(653.54,1748.03)
ADC_IN1: C180.1 IC81.23 R233.2 R234.1 | length 1946.9
  Top w6: v1(408.93,1437.01) 416.08,1437.01 448.48,1469.41 634.56,1469.41 682.58,1517.43 775.52,1517.43 800.82,1492.12 v1(834.64,1492.12)
  Bot w6: R234.1@47.24,988.19 48.43,987.01 R233.2@129.92,987.01 130.71,987.01 147.61,1003.91 147.61,1008.76 153.75,1014.91 207.98,1014.91 210.23,1012.65 264.45,1012.65 280.2,1028.4 287.33,1028.4 315.42,1056.49 315.42,1242.67 412.92,1340.17 412.92,1391.76 408.93,1395.75 v1(408.93,1437.01) ; IC81.23@604.33,2001.97 604.33,2014.04 609.11,2014.04 609.11,2018.97 617.84,2027.7 646.27,2027.7 672.66,2001.31 673.55,2001.31 683.11,1991.75 721.31,1991.75 724.01,1989.05 769.61,1989.05 862.86,1895.8 862.86,1869.05 866.25,1865.65 866.25,1522.53 835.85,1492.12 v1(834.64,1492.12)
ADC_IN2: C179.1 IC81.24 R235.2 R236.1 | length 1758.3
  Top w6: v1(420.93,1468.5) 424.29,1468.5 437.19,1481.41 629.59,1481.41 677.61,1529.43 785.67,1529.43 797.67,1517.43 816.96,1517.43 v1(820.2,1514.18)
  Bot w6: R236.1@177.17,988.19 254.72,988.19 R235.2@259.84,983.07 260.63,983.07 277.53,999.97 277.53,1008.76 285.17,1016.4 292.3,1016.4 327.42,1051.52 327.42,1237.7 424.92,1335.2 424.92,1426.35 427.77,1429.2 427.77,1444.81 420.93,1451.66 v1(420.93,1468.5) ; IC81.24@624.02,2001.97 624.02,2002.04 624.11,2002.04 627.6,2005.53 651.42,2005.53 667.63,1989.31 668.58,1989.31 678.14,1979.75 716.34,1979.75 719.03,1977.05 764.64,1977.05 850.86,1890.83 850.86,1864.07 854.25,1860.68 854.25,1527.5 840.93,1514.18 v1(820.2,1514.18)
ADC_IN3: C178.1 IC81.25 R237.2 R238.1 | length 1668.6
  Top w6: v1(425.2,1496.06) 427.85,1493.41 624.62,1493.41 672.64,1541.43 790.64,1541.43 802.64,1529.43 808.8,1529.43 812.4,1533.02 833.13,1533.02 v1(835.41,1535.3)
  Bot w6: R238.1@307.09,988.19 R238.1@309.06,988.19 ; C178.1@389.76,986.22 387.8,988.19 R238.1@309.06,988.19 ; v1(425.2,1496.06) 425.2,1490.88 439.77,1476.31 439.77,1396.55 436.92,1393.7 436.92,1329.71 339.42,1232.21 339.42,1018.56 R238.1@309.06,988.19 ; IC81.25@651.57,1974.41 665.62,1974.41 672.29,1967.75 711.37,1967.75 714.06,1965.05 759.67,1965.05 838.86,1885.86 838.86,1859.1 841.86,1856.1 841.86,1541.76 v1(835.41,1535.3)
DEV_RESETn: IC81.26 R329.1 T29.1 | length 774.6
  Top w6: v1(700.79,1948.81) 700.79,2059.05 730.96,2089.23 v1(730.96,2097.74) ; v1(783.46,2114.17) v1(783.46,2161.42)
  Bot w6: T29.1@458.66,2312.99 467.96,2322.29 512.45,2322.29 R329.1@520.87,2330.71 519.03,2328.88 519.03,2285.03 523.42,2280.64 545.68,2280.64 547.85,2282.81 576.06,2282.81 579.8,2279.06 688.87,2279.06 744.24,2223.69 744.24,2186.93 767.13,2164.04 780.85,2164.04 v1(783.46,2161.42) ; IC81.26@651.57,1954.72 694.88,1954.72 v1(700.79,1948.81) ; v1(730.96,2097.74) 767.03,2097.74 v1(783.46,2114.17)
DI_1: C189.1 IC81.12 R254.1 | length 2204
  Top w6: v1(86.61,1728.34) 86.61,1709.57 48.43,1671.38 48.43,1498.58 56.35,1490.66 56.35,936.46 v1(90.89,901.92) ; v1(303.15,1728.34) 352.36,1777.56 352.36,1832.67 v1(354.33,1834.64) ; v1(409.45,783.46) 411.42,781.5 470.47,781.5 v1(472.44,779.53)
  Bot w6: v1(90.89,901.92) 129.98,862.83 129.98,824.11 213.09,741 247.92,741 290.39,783.46 v1(409.45,783.46) ; v1@92.17,1722.79 v1(86.61,1728.34) 89.71,1731.44 201.77,1731.44 223.71,1709.5 283.39,1709.5 302.24,1728.34 v1(303.15,1728.34) ; v1(354.33,1834.64) 415.36,1895.67 IC81.12@458.66,1895.67 ; v1(472.44,779.53) 472.44,775.82 461.28,764.67 461.28,601.97 543.12,520.13 544.83,520.13 C189.1@559.06,505.91 R254.1@559.06,471.26
DI_2: C190.1 IC81.13 R255.1 | length 2327.2
  Top w6: v1(51.18,791.34) 27.15,815.37 27.15,1673.6 62.99,1709.45 v1(62.99,1712.59) ; v1(275.59,1728.34) 275.59,1760.07 330.71,1815.19 v1(330.71,1818.89) ; v1(409.45,755.9) v1(492.12,755.9)
  Bot w6: v1(51.18,791.34) 115.75,791.34 178.09,729 252.89,729 288.51,764.62 404.67,764.62 ; v1(62.99,1712.59) 62.99,1736.22 73.96,1747.19 94.42,1747.19 98.16,1743.44 206.74,1743.44 222.24,1727.95 275.19,1727.95 v1(275.59,1728.34) ; v1(330.71,1818.89) 330.78,1818.96 330.78,1837.74 358.85,1865.81 366.97,1865.81 416.51,1915.35 IC81.13@458.66,1915.35 ; v1@484.25,755.9 473.28,744.94 473.28,712.73 577.9,608.12 577.9,575.91 633.67,520.13 635.38,520.13 C190.1@649.61,505.91 R255.1@649.61,471.26
DI_3: C191.1 IC81.14 R256.1 | length 2363.1
  Top w6: v1(35.43,1712.59) 35.43,1698.86 15.15,1678.57 15.15,800.73 44.22,771.65 v1(70.87,771.65) ; v1(248.03,1746.79) 248.03,1756.14 303.15,1811.25 v1(303.15,1814.96) ; v1(413.39,724.41) v1(492.13,724.41)
  Bot w6: v1(35.43,1712.59) 50.99,1728.15 50.99,1741.19 68.99,1759.19 99.39,1759.19 101.83,1756.74 210.41,1756.74 220.36,1746.79 v1(248.03,1746.79) ; v1(70.87,771.65) 125.52,717 257.86,717 265.27,724.41 v1(413.39,724.41) ; v1(303.15,1814.96) 305.77,1817.58 305.77,1829.7 353.88,1877.81 362,1877.81 419.22,1935.04 IC81.14@458.66,1935.04 ; v1(492.13,724.41) 518.77,724.41 716.26,526.92 738.83,526.92 C191.1@748.03,517.72 R256.1@748.03,479.13
DIG_O1: IC81.22 R263.2 T14.1 | length 3018.8
  Top w6: v1(70.87,1586.61) 70.87,1666.58 114.17,1709.88 v1(114.17,1775.59) ; v1(279.53,1047.24) 281.5,1045.27 356.3,1045.27 v1(358.27,1043.3) ; v1(295.27,1484.25) 350.5,1484.25 351.88,1485.63 361.94,1485.63 v1(362.2,1485.36) ; v1(421.26,2074.8) 515.74,2074.8 536.09,2095.14 v1@582.68,2095.14
  Bot w6: R263.2@62.99,636.61 v1(94.49,636.61) 110.28,636.61 120.08,646.41 T14.1@120.08,647.64 120.08,655.51 165.04,700.47 416.09,700.47 432.23,716.6 432.23,897.52 418.96,910.79 418.96,994.16 404.56,1008.56 393.01,1008.56 v1(358.27,1043.3) ; v1(70.87,1586.61) 70.87,1495.08 89.42,1476.52 287.55,1476.52 v1(295.27,1484.25) ; v1(114.17,1775.59) 80.78,1775.59 43.99,1812.37 43.99,1972.38 64.45,1992.83 266.87,1992.83 299.07,1960.63 391.66,1960.63 404.67,1973.63 404.67,2022.43 398.48,2028.62 398.48,2052.75 420.53,2074.8 v1(421.26,2074.8) ; v1(279.53,1047.24) 279.53,1050.95 276.43,1054.04 276.43,1237.62 388.92,1350.11 388.92,1381.82 378.09,1392.65 378.09,1449.78 384.93,1456.63 384.93,1476.03 375.6,1485.36 v1(362.2,1485.36) ; v1@577.02,2095.14 591.08,2095.14 614.17,2072.05 614.17,2039.7 612.87,2039.7 600.87,2027.7 598.16,2027.7 596.5,2026.04 585.3,2026.04 584.65,2025.39 IC81.22@584.65,2001.97
  other v1: 582.68,2098.42
DIG_O2: IC81.16 J92.1 R266.2 T15.1 | length 3177.4
  Top w6: v1(98.43,1586.61) 98.43,1677.17 141.73,1720.47 v1(141.73,1779.52) ; v1(295.28,1074.8) v1(358.27,1074.8) ; v1(295.27,1515.74) 351.97,1515.74 358.27,1509.45 v1(358.27,1511.81) ; v2(408.01,2192.91) 410.31,2190.61 v2(410.31,2138.12) ; v1(417.32,2044.95) 453.73,2044.95 v2(456.03,2047.24)
  Bot w6: v1(98.43,1586.61) 92.16,1586.61 90.55,1585 90.55,1507.87 107.54,1490.88 273.19,1490.88 295.27,1512.97 v1(295.27,1515.74) ; v1(141.73,1779.52) 118.11,1803.15 118.11,1829.99 56.35,1891.75 56.35,1967.77 69.42,1980.83 261.9,1980.83 294.1,1948.63 396.64,1948.63 416.67,1968.66 416.67,2044.29 v1(417.32,2044.95) 415.68,2044.95 v1@413.39,2047.24 ; v1(295.28,1074.8) 295.28,1239.49 400.92,1345.14 400.92,1386.79 390.09,1397.62 390.09,1444.81 396.93,1451.66 396.93,1485.4 370.52,1511.81 v1(358.27,1511.81) ; v1(358.27,1074.8) 382.89,1050.18 382.89,1042.57 404.9,1020.56 409.53,1020.56 430.96,999.13 430.96,915.76 444.23,902.49 444.23,711.63 421.06,688.47 294.77,688.47 261.81,655.51 T15.1@261.81,647.64 261.81,639.76 285.68,615.9 389.22,615.9 R266.2@397.64,607.48 ; v2(408.01,2192.91) 408.01,2202.97 412.18,2207.14 532.91,2207.14 547.31,2192.74 562.92,2192.74 573.96,2203.77 573.96,2209.39 595.67,2231.1 J92.1@627.95,2231.1 ; v2(410.31,2138.12) 410.31,2136.93 417.32,2129.92 ; 418.17,2129.92 418.17,2112.41 423.44,2107.14 432.53,2107.14 456.03,2083.65 v2(456.03,2047.24) 456.03,2033.64 458.44,2031.23 458.44,2018.04 466.49,2009.99 466.49,1977.09 463.8,1974.41 IC81.16@458.66,1974.41